# EAGLE board Main BoardV3 (EAGLE 9.1.3)

Size 100 x 100 mm. Coordinates in mm from the lower left corner, seen from the top.
Outline: 0,0 100,0 100,100 0,100 0,0
Copper layers (1*16): Top 0.035mm / dielectric 1.5mm / Bottom 0.035mm
Design rules "default": minimum track width 6mil, minimum drill 0.35mm, track to track 6mil, track to pad 6mil, pad to pad 6mil, via to via 6mil, smd to smd 6mil, copper to edge 40mil, drill to drill 6mil, minimum pad ring 10mil, minimum via ring 8mil, stop-mask expansion 4mil, vias tented up to drill 0mil, thermal gap 10mil

## Footprints (pad centres in the part's own frame; a part is rotated, then mirrored left to right if it is on the bottom)
C0805 = smd 1.3 x 1.5: 1 -0.95,0; 2 0.95,0
ESP8266MOD = smd 2.007 x 0.991: 1 0,0; 2 0,-2.007; 3 0,-4.013; 4 0,-6.02; 5 0,-8.026; 6 0,-10.033; 7 0,-12.04; 8 0,-14.046; 15 16.053,-14.046; 16 16.053,-12.04; 17 16.053,-10.033; 18 16.053,-8.026; 19 16.053,-6.02; 20 16.053,-4.013; 21 16.053,-2.007; 22 16.002,0 | smd 0.991 x 2.007: 9 2.997,-16.002; 10 5.004,-16.002; 11 7.01,-16.002; 12 9.017,-16.002; 13 11.024,-16.002; 14 13.03,-16.002
1X10_NO_SILK = drill 1.016 pad 1.88: 1 0,0; 2 2.54,0; 3 5.08,0; 4 7.62,0; 5 10.16,0; 6 12.7,0; 7 15.24,0; 8 17.78,0; 9 20.32,0; 10 22.86,0
2X10_NOSILK = drill 1.016 pad 1.88: 1 0,0; 2 0,2.54; 3 2.54,0; 4 2.54,2.54; 5 5.08,0; 6 5.08,2.54; 7 7.62,0; 8 7.62,2.54; 9 10.16,0; 10 10.16,2.54; 11 12.7,0; 12 12.7,2.54; 13 15.24,0; 14 15.24,2.54; 15 17.78,0; 16 17.78,2.54; 17 20.32,0; 18 20.32,2.54; 19 22.86,0; 20 22.86,2.54
2X10_LOCK = drill 1.016 pad 1.88: 1 0,0.127; 2 0,2.667; 3 2.54,-0.127; 4 2.54,2.413; 5 5.08,0.127; 6 5.08,2.667; 7 7.62,-0.127; 8 7.62,2.413; 9 10.16,0.127; 10 10.16,2.667; 11 12.7,-0.127; 12 12.7,2.413; 13 15.24,0.127; 14 15.24,2.667; 15 17.78,-0.127; 16 17.78,2.413; 17 20.32,0.127; 18 20.32,2.667; 19 22.86,-0.127; 20 22.86,2.413
1X20 = drill 1.016 long: 1 -24.13,0; 2 -21.59,0; 3 -19.05,0; 4 -16.51,0; 5 -13.97,0; 6 -11.43,0; 7 -8.89,0; 8 -6.35,0; 9 -3.81,0; 10 -1.27,0; 11 1.27,0; 12 3.81,0; 13 6.35,0; 14 8.89,0; 15 11.43,0; 16 13.97,0; 17 16.51,0; 18 19.05,0; 19 21.59,0; 20 24.13,0
DIP762W53P254L1969H508Q16B = drill 0.743 pad 1.343: 1 -3.81,8.89; 2 -3.81,6.35; 3 -3.81,3.81; 4 -3.81,1.27; 5 -3.81,-1.27; 6 -3.81,-3.81; 7 -3.81,-6.35; 8 -3.81,-8.89; 9 3.81,-8.89; 10 3.81,-6.35; 11 3.81,-3.81; 12 3.81,-1.27; 13 3.81,1.27; 14 3.81,3.81; 15 3.81,6.35; 16 3.81,8.89
MA04-1 = drill 1.016 long: 1 -3.81,0; 2 -1.27,0; 3 1.27,0; 4 3.81,0
MA03-1 = drill 1.016 long: 1 -2.54,0; 2 0,0; 3 2.54,0
DIP1524W60P254L6350H635Q48A = drill 1.112 pad 1.812: 1 -7.62,29.21; 2 -7.62,26.67; 3 -7.62,24.13; 4 -7.62,21.59; 5 -7.62,19.05; 6 -7.62,16.51; 7 -7.62,13.97; 8 -7.62,11.43; 9 -7.62,8.89; 10 -7.62,6.35; 11 -7.62,3.81; 12 -7.62,1.27; 13 -7.62,-1.27; 14 -7.62,-3.81; 15 -7.62,-6.35; 16 -7.62,-8.89; 17 -7.62,-11.43; 18 -7.62,-13.97; 19 -7.62,-16.51; 20 -7.62,-19.05; 21 -7.62,-21.59; 22 -7.62,-24.13; 23 -7.62,-26.67; 24 -7.62,-29.21; 25 7.62,-29.21; 26 7.62,-26.67; 27 7.62,-24.13; 28 7.62,-21.59; 29 7.62,-19.05; 30 7.62,-16.51; 31 7.62,-13.97; 32 7.62,-11.43; 33 7.62,-8.89; 34 7.62,-6.35; 35 7.62,-3.81; 36 7.62,-1.27; 37 7.62,1.27; 38 7.62,3.81; 39 7.62,6.35; 40 7.62,8.89; 41 7.62,11.43; 42 7.62,13.97; 43 7.62,16.51; 44 7.62,19.05; 45 7.62,21.59; 46 7.62,24.13; 47 7.62,26.67; 48 7.62,29.21

## Placement (x,y rotation side)
C1  [C0805]  87.63,74.93 0 top
C2  [C0805]  87.63,78.74 0 top
C3  [C0805]  87.63,82.55 0 top
C4  [C0805]  87.63,86.36 0 top
C5  [C0805]  93.98,82.55 0 top
C6  [C0805]  93.98,78.74 0 top
C7  [C0805]  87.63,90.17 0 top
C8  [C0805]  87.63,93.98 0 top
C9  [C0805]  13.97,22.86 0 bottom
C10  [C0805]  93.98,86.36 0 top
C11  [C0805]  93.98,90.17 0 top
C12  [C0805]  93.98,93.98 0 top
C13  [C0805]  93.98,74.93 0 top
ESP1  ESP8266  [ESP8266MOD]  21.59,8.89 180 top
J1  [1X10_NO_SILK]  85.09,11.43 90 top
J2  [2X10_NOSILK]  90.17,11.43 90 top
J3  [2X10_LOCK]  15.24,31.75 90 top
JP1  [1X20]  41.91,96.52 0 top
L1  L293  [DIP762W53P254L1969H508Q16B]  17.78,81.28 0 top
L2  L293  [DIP762W53P254L1969H508Q16B]  30.48,81.28 0 top
L3  L293  [DIP762W53P254L1969H508Q16B]  43.18,81.28 0 top
L4  L293  [DIP762W53P254L1969H508Q16B]  59.69,81.28 0 top
L5  L293  [DIP762W53P254L1969H508Q16B]  71.12,81.28 0 top
SV1  [MA04-1]  72.39,96.52 0 top
SV2  [MA03-1]  87.63,52.07 90 top
SV3  [MA03-1]  87.63,60.96 270 top
TEENSY3.5  TEENSY_3.5  [DIP1524W60P254L6350H635Q48A]  50.8,35.56 180 top

## Library data of the parts
C1-C13 = sym
ESP1 = ESP8266
J1 = SparkFun-Connectors; PROD_ID: CONN-11563
J2 J3 = SparkFun-Connectors
JP1 = adafruit
L1-L5 = L293
SV1-SV3 = con-lstb; OC_FARNELL: unknown; OC_NEWARK: unknown
TEENSY3.5 = Teensy_3.5

## Nets
3.3V: C9.1 ESP1.8 TEENSY3.5.15 TEENSY3.5.46
5V: TEENSY3.5.48
ADC: ESP1.2 J3.2
CSO-ESP: ESP1.9 J3.9
ENABLE: ESP1.3 J3.3
GND: C9.2 ESP1.15 TEENSY3.5.1 TEENSY3.5.34
GPIO0: ESP1.18 J3.4
GPIO2: ESP1.17 J3.6
GPIO4: ESP1.19 J3.8
GPIO5: ESP1.20 J3.10
GPIO9: ESP1.11 J3.12
GPIO10: ESP1.12 J3.14
GPIO12: ESP1.6 J3.16
GPIO13: ESP1.7 J3.18
GPIO14: ESP1.5 J3.20
GPIO15: ESP1.16 J3.19
GPIO16: ESP1.4 J3.17
MISO-ESP: ESP1.10 J3.15
MOSI-ESP: ESP1.13 J3.13
RST: ESP1.1 J3.1
RXD-ESP: ESP1.21 J3.5
SCLK-ESP: ESP1.14 J3.11
TXD-ESP: ESP1.22 J3.7

## Tracks (layer width: path | path; a pad name or v marks a point on that pad's centre or on a via)
3.3V  (3 unrouted)
ADC  (1 unrouted)
CSO-ESP  (1 unrouted)
ENABLE  (1 unrouted)
GND  (3 unrouted)
GPIO0  (1 unrouted)
GPIO2  (1 unrouted)
GPIO4  (1 unrouted)
GPIO5  (1 unrouted)
GPIO9  (1 unrouted)
GPIO10  (1 unrouted)
GPIO12  (1 unrouted)
GPIO13  (1 unrouted)
GPIO14  (1 unrouted)
GPIO15  (1 unrouted)
GPIO16  (1 unrouted)
MISO-ESP  (1 unrouted)
MOSI-ESP  (1 unrouted)
RST  (1 unrouted)
RXD-ESP  (1 unrouted)
SCLK-ESP  (1 unrouted)
TXD-ESP  (1 unrouted)